# Altium PCB FOS 00_02_00_02 Rev 1_4.PcbDoc
Units mm, origin at the board's own origin, x right, y up, seen from the top; angles counter-clockwise.
Board outline 194.8 x 15.3 mm, 2 copper layers (Top Layer, Bottom Layer), stack 1.571 mm thick; 34 components, 28 nets, 93 pads, 14 vias.
Unrouted connection lines stored in the file: 2.
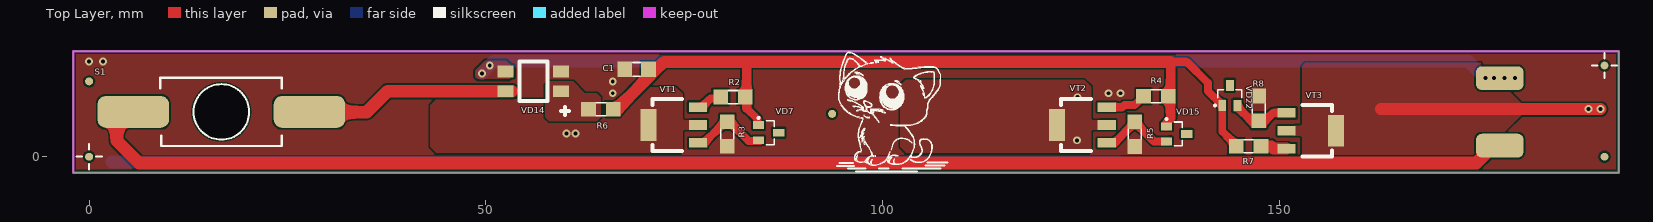
[diagram p0: Top Layer view]
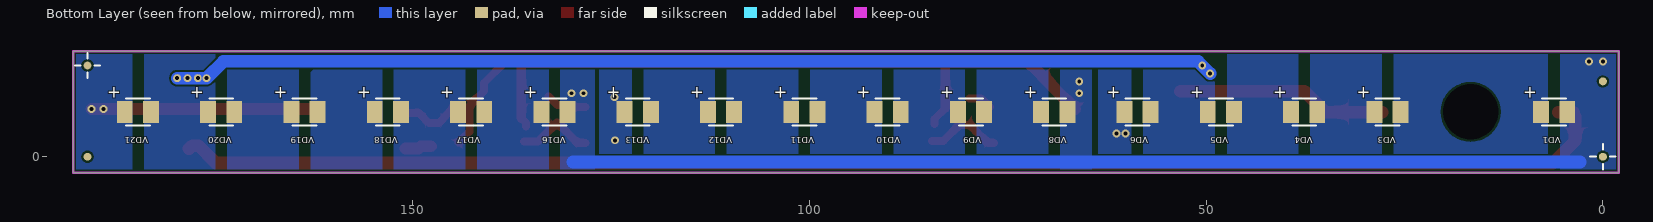
[diagram p1: Bottom Layer view, seen from below]
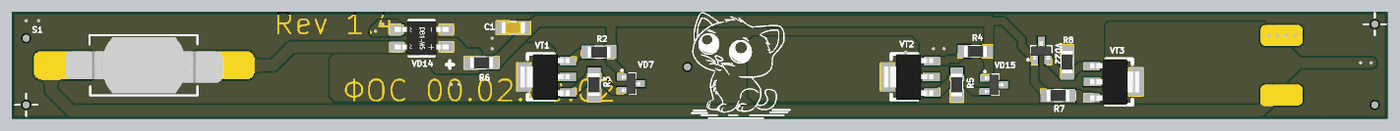
[diagram p2: 3D render of the assembled board from above, using the file's embedded part models]
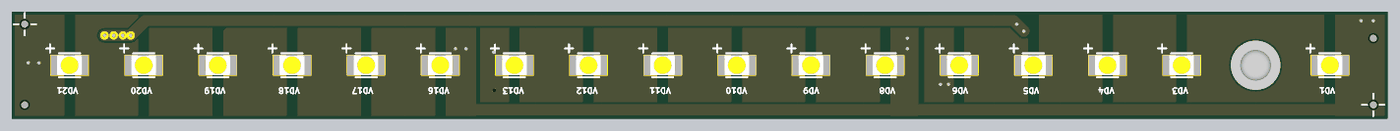
[diagram p3: 3D render of the assembled board from below, using the file's embedded part models]

## Layer stack, top to bottom
Top Solder: solder mask 0.0102, Solder Resist, Dk 3.5
Top Layer: signal copper 0.0356
Dielectric 1: dielectric 1.5, FR-4, Dk 4.8
Bottom Layer: signal copper 0.0356
Bottom Solder: solder mask 0.0102, Solder Resist, Dk 3.5

## Board outline
-2,-2 192.8,-2 192.8,13.3 -2,13.3

## Design rules (kind name [scope] priority, off if disabled: settings)
Clearance [All] p1: gap=0.254 ignorepadtopadclearanceinfootprint=FALSE // 0.5
PolygonConnect [All] p1: connectstyle=Direct reliefconductorwidth=0.254 reliefentries=4 polygonreliefangle="90 Angle" airgapwidth=0.254
RoutingVias [All] p1: holewidth=0.711 width=1.27 viastyle="Through Hole" minholewidth=0.711 minwidth=1.27 maxholewidth=0.711 maxwidth=1.27
SolderMaskExpansion [All] p1: expansion=0.102
Width [All] p1: maxlimit=10 minlimit=0.254 preferedwidth=1.6
30 further rules are at their usual default settings.

## Components (designator, comment, footprint, x,y, rotation, side; value= is the part's Value field where it differs from the comment)
C1 "Capacitor" CAP1206 69,11 r0 top value="1 uF"
R2 "Resistor" RES1206 81.15,7.525 r0 top value="20 Om"
R3 "Resistor" RES1206 80.45,2.875 r90 top value="10 kOm"
R4 "Resistor" RES1206 134.45,7.625 r0 top value="20 Om"
R5 "Resistor" RES1206 131.8,2.85 r90 top value="10 kOm"
R6 "Resistor" RES1206 64.5,6 r180 top value="33 Om"
R7 "Resistor" RES1206 146.15,1.325 r180 top value="20 Om"
R8 "Resistor" RES1206 147.425,6.1 r270 top value="10 kOm"
S1 "button" BUTTON1_2 16.675,5.65 r180 top
VD1 "LED" LED_SAKURA 6.15,5.65 r180 bottom
VD3 "LED" LED_SAKURA 27.15,5.65 r180 bottom
VD4 "LED" LED_SAKURA 37.65,5.65 r180 bottom
VD5 "LED" LED_SAKURA 48.15,5.65 r180 bottom
VD6 "LED" LED_SAKURA 58.65,5.65 r180 bottom
VD7 "BAV23S" "SOT 23" 85.65,3.025 r0 top
VD8 "LED" LED_SAKURA 69.15,5.65 r180 bottom
VD9 "LED" LED_SAKURA 79.65,5.65 r180 bottom
VD10 "LED" LED_SAKURA 90.15,5.65 r180 bottom
VD11 "LED" LED_SAKURA 100.65,5.65 r180 bottom
VD12 "LED" LED_SAKURA 111.15,5.65 r180 bottom
VD13 "LED" LED_SAKURA 121.65,5.65 r180 bottom
VD14 "Diode Bridge" DB-1MS 56,9.5 r270 top value=B1S
VD15 "BAV23S" "SOT 23" 137.075,2.875 r0 top
VD16 "LED" LED_SAKURA 132.15,5.65 r180 bottom
VD17 "LED" LED_SAKURA 142.65,5.65 r180 bottom
VD18 "LED" LED_SAKURA 153.15,5.65 r180 bottom
VD19 "LED" LED_SAKURA 163.65,5.65 r180 bottom
VD20 "LED" LED_SAKURA 174.15,5.65 r180 bottom
VD21 "LED" LED_SAKURA 184.65,5.65 r180 bottom
VD22 "BAV23S" "SOT 23" 143.775,7.725 r90 top
VT1 "PNP" SOT223 73.5,4 r90 top value=BCP53
VT2 "PNP" SOT223 125,4 r90 top value=BCP53
VT3 "PNP" SOT223 154.175,3.275 r270 top value=BCP53
? "Comment" cat 100.625,6.9 r0 top

## Footprints (in the part's own frame and the unit in brackets; to place one, negate y for a bottom-side part, rotate by r counter-clockwise, add the part's x,y. Pads: shape width x height; smd on the part's side, far side on the other; paste and mask are expansions set on the pad)
BUTTON1_2 [mm]
  round 0 hole 7: 0(0,0)
  rrect50% 9x4 smd paste-4: 1(-11.1,0) 2(11.1,0)
  silkscreen extent -7.6,-4.3 7.7,4.3, body extent -11.2,-4 11.2,4, height 4
CAP1206 [mm]
  rect 1.85x1.95 smd: 1(-1.5,0) 2(1.5,0)
  silkscreen extent -0.45,-0.87 0.45,0.87, body extent -1.65,-0.85 1.65,0.85, height 1.5
cat [mm]
  silkscreen extent -6.36,-8.78 7.55,6.25
DB-1MS [mm]
  rect 1.5x2 smd: 1(1.25,3.5) 2(-1.25,3.5) 3(-1.25,-3.5) 4(1.25,-3.5)
  silkscreen extent -2.5,-1.75 4.25,4.5, body extent -2.45,-3.8 2.45,3.8, height 2.9
LED_SAKURA [mm]
  rect 2x2.8 smd: 1(1.651,0) 2(-1.651,0)
  silkscreen extent -1.5,-1.7 1.5,1.7, body extent -1.78,-1.4 1.78,1.4, height 0.7
RES1206 [mm] "Chip Resistor, 2-Leads, Body 3,20x1,60mm, IPC Medium Density"
  rect 1.85x1.85 smd: 1(-1.55,0) 2(1.55,0)
  silkscreen extent -0.6,-0.82 0.6,0.82, body extent -1.6,-0.8 1.6,0.8, height 0.6
SOT223 [mm]
  rect 1.2x2.3 smd: 1(-2.25,-3.25) 2(0,-3.25) 3(2.25,-3.25)
  rect 4x2 smd: 4(0,3)
  silkscreen extent -3.25,-1.25 3.25,2.5, body extent -3.25,-3.48 3.25,3.48, height 1.7
"SOT 23" [mm] "SOT23, 3-Leads, Body 2,90x2,45mm, Pitch 0,95mm, IPC Medium Density"
  rect 1.4x1 smd: 1(-1.275,0.95) 2(-1.275,-0.95) 3(1.275,0)
  silkscreen extent -1.4,-1.5 0.7,2, body extent -1.3,-1.5 1.3,1.5, height 1.1

## Free pads (board coordinates)
  rrect50% 6x3 smd paste-3: 1(177.8,1.4)
  rrect50% 6x3 smd paste-3 mask+0.102: 1(177.8,9.9)
  round 1 smd mask+0.2: 2(0,0) 2(0,9.5) 2(93.65,5.4) 2(191,0) 2(191,11.5)
  round 1 smd far side mask+0.2: 2(0,0) 2(0,9.5) 2(191,0) 2(191,11.5)
  round 1 hole 0.5: 3(176,9.9) 3(177.1,9.9) 3(178.4,9.9) 3(179.7,9.9)

## Via types
v1: diameter 1, hole 0.5, Top Layer to Bottom Layer, tented both sides, 14 vias

## Nets (pads, with @x,y where several pads share a name; then routed paths per layer and width w, separated by ;. In a path a pad name is that pad's centre, name@x,y a point inside that pad or via, vN(x,y) a via of type N, cw(c..) or ccw(c..) an arc to the next point about the centre after c; other vN are vias at no path point)
GND: C1.1 R3.1 R5.1 R8.1 VD1.1 VD8.1 VD14.2 VD16.1 | length 126.9
  Bottom Layer w1.6: 2.9,-0.675 129.8,-0.675
  other v1: 66,8 128.5,8 130,8 66,9.5 0,12 1.75,12
NetC1_2: C1.2 R2.2 R4.2 R6.1 R7.2 VD7.1 VD15.1 VD22.1 | length 103.6
  Top Layer w1: 82.875,6.125 84.225,4.775 VD7.1@84.225,4.15 ; VD15.1@135.725,3.825 135.725,4.275 136.325,4.875 ; 136.325,11.95 138.375,11.95 141,9.325 141,8.3 142.825,6.475 VD22.1 142.825,3.2 R7.2@144.225,1.8
  Top Layer w1.2: 82.875,6.125 82.875,11.9 ; 136.325,4.875 136.325,11.95
  Top Layer w1.5: R6.1@66.5,6 72.45,11.95 136.325,11.95
NetR2_1: R2.1 VT1.3 | length 3
  Top Layer w1: VT1.3@77.275,6.275 78.35,7.35 R2.1@79.825,7.35
NetR3_2: R3.2 VD7.2 VT1.1 | length 9.6
  Top Layer w1: VT1.1 77.525,1.75 79.775,4 81.125,4 83.125,2 VD7.2@84.55,2
NetR4_1: R4.1 VT2.3 | length 5.2
  Top Layer w1: VT2.3 130.25,6.25 130.5,6.5 131.775,6.5 R4.1
NetR5_2: R5.2 VD15.2 VT2.1 | length 9.8
  Top Layer w1: VT2.1 129.25,1.75 131.825,4.325 134.225,1.925 VD15.2 VD15.2@136,1.925
NetR6_2: R6.2 VD14.1
NetR7_1: R7.1 VT3.3 | length 3.3
  Top Layer w1.5: R7.1 149,1.325 149.3,1.025 VT3.3
NetR8_2: R8.2 VD22.2 VT3.1 | length 7.4
  Top Layer w1: VD22.2@144.825,6.175 146.775,4.225 147.925,4.225 149.225,5.525 VT3.1
NetVD1_2: VD1.2 VD3.1
NetVD3_2: VD3.2 VD4.1
NetVD4_2: VD4.2 VD5.1
NetVD5_2: VD5.2 VD6.1
NetVD6_2: VD6.2 VT1.2 VT1.4
  other v1: 61.3,2.925 60.175,2.95
NetVD8_2: VD8.2 VD9.1
NetVD9_2: VD9.2 VD10.1
NetVD10_2: VD10.2 VD11.1
NetVD11_2: VD11.2 VD12.1
NetVD12_2: VD12.2 VD13.1
NetVD13_2: VD13.2 VT2.2 VT2.4
  other v1: 124.5,2.075 124.575,7.5
NetVD16_2: VD16.2 VD17.1
NetVD17_2: VD17.2 VD18.1
NetVD18_2: VD18.2 VD19.1
NetVD19_2: VD19.2 VD20.1
NetVD20_2: VD20.2 VD21.1
NetVD21_2: VD21.2 VT3.2 VT3.4 | length 27.7
  Top Layer w1.5: 162.8,6 v1(189,6) v1(190.5,6)
POWER1: pad.1@177.8,9.9 pad.3 VD14.3 | length 131.7
  Bottom Layer w1.6: v1(49.5,10.5) 51.025,12.025 173.875,12.025 176,9.9 177.1,9.9 178.4,9.9 pad.3@179.7,9.9
  other v1: 50.5,11.5
POWER2: pad.1@177.8,1.4 S1.1 S1.2 VD14.4 | length 208.4
  Top Layer w1.6: S1.2@3.5,5 3.5,2 6.296,-0.796 174.828,-0.796 177.024,1.4 177.8,1.4 pad.1@178.2,1 ; S1.2@3.7,5.625 S1.2@5.6,5.625 ; S1.1@27.8,5.625 35,5.625 37.625,8.25 VD14.4 VD14.4@53.275,8.25
pads on no net: S1.0 VD7.3 VD15.3 VD22.3

## Polygon pours and split planes (outlines as drawn)
NetVD20_2 on Bottom Layer "Bottom Layer-No Net 1" (solid, remove dead copper, pour order 38): 174.925,13.3 183.875,13.3 183.875,-2 174.925,-2
NetVD19_2 on Bottom Layer "Bottom Layer-No Net 1" (solid, remove dead copper, pour order 36): 164.375,13.3 173.4,13.3 173.4,-2 164.375,-2
NetVD18_2 on Bottom Layer "Bottom Layer-No Net 1" (solid, remove dead copper, pour order 34): 153.875,13.3 162.875,13.3 162.875,-2 153.875,-2
NetVD17_2 on Bottom Layer "Bottom Layer-No Net 1" (solid, remove dead copper, pour order 32): 143.4,13.3 152.375,13.3 152.375,-2 143.4,-2
NetVD16_2 on Bottom Layer "Bottom Layer-No Net 1" (solid, remove dead copper, pour order 30): 132.875,13.3 141.9,13.3 141.9,-2 132.875,-2
GND on Bottom Layer "Bottom Layer-No Net 1" (solid, remove dead copper, pour order 28): 127.075,13.3 131.4,13.3 131.4,-2 127.075,-2
NetVD13_2 on Bottom Layer "Bottom Layer-No Net 1" (solid, remove dead copper, pour order 26): 122.4,13.3 126.5,13.3 126.5,-2 122.4,-2
NetVD12_2 on Bottom Layer "Bottom Layer-No Net 1" (solid, remove dead copper, pour order 24): 111.925,13.3 120.9,13.3 120.9,-2 111.925,-2
NetVD11_2 on Bottom Layer "Bottom Layer-No Net 1" (solid, remove dead copper, pour order 22): 101.4,13.3 110.4,13.3 110.4,-2 101.4,-2
NetVD10_2 on Bottom Layer "Bottom Layer-No Net 1" (solid, remove dead copper, pour order 20): 90.9,13.3 99.9,13.3 99.9,-2 90.9,-2
NetVD9_2 on Bottom Layer "Bottom Layer-No Net 1" (solid, remove dead copper, pour order 18): 80.425,13.3 89.375,13.3 89.375,-2 80.425,-2
NetVD8_2 on Bottom Layer "Bottom Layer-No Net 1" (solid, remove dead copper, pour order 16): 69.9,13.3 78.9,13.3 78.9,-2 69.9,-2
GND on Bottom Layer "Bottom Layer-No Net 1" (solid, remove dead copper, pour order 14): 68.4,13.3 64.4,13.3 64.4,-2 68.4,-2
NetVD6_2 on Bottom Layer "Bottom Layer-No Net 1" (solid, remove dead copper, pour order 12): 59.425,13.3 63.6,13.3 63.6,-2 59.425,-2
NetVD5_2 on Bottom Layer "Bottom Layer-No Net 1" (solid, remove dead copper, pour order 10): 48.925,13.301 57.925,13.301 57.925,-1.999 48.925,-1.999
GND on Bottom Layer "Bottom Layer-No Net 1" (solid, remove dead copper, pour order 0): 5.4,13.3 -2,13.3 -2,-2 5.4,-2
NetVD3_2 on Bottom Layer "Bottom Layer-No Net 1" (solid, remove dead copper, pour order 6): 27.9,13.3 36.875,13.3 36.875,-2 27.9,-2
NetVD4_2 on Bottom Layer "Bottom Layer-No Net 1" (solid, remove dead copper, pour order 8): 38.4,13.301 47.375,13.301 47.375,-1.999 38.4,-1.999
NetVD21_2 on Bottom Layer "Bottom Layer-No Net 1" (solid, remove dead copper, pour order 40): 185.375,13.3 192.8,13.3 192.8,-2 185.375,-2
NetVD1_2 on Bottom Layer "Bottom Layer-No Net 1" (solid, remove dead copper, pour order 2): 6.925,13.3 26.375,13.3 26.375,-2 6.925,-2
GND on Top Layer "Bottom Layer-No Net 1" (solid, remove dead copper, pour order 68): -2,-2 -2,13.3 192.8,13.3 192.8,-2
NetVD21_2 on Top Layer "Bottom Layer-No Net 1" (solid, remove dead copper, pour order 62): 180.5,5.25 175.112,-0.147 153.297,-0.147 152.875,0.275 152.875,2.475 152.675,2.675 151.875,2.675 151.875,3.875 152.675,3.875 152.875,4.075 152.875,11.425 153.3,11.85 175.4,11.85 180.5,6.75
NetVD6_2 on Top Layer "Bottom Layer-No Net 1" (solid, remove dead copper, pour order 66): 66.1,0.5 43.75,0.5 43,1.25 43,6.5 43.75,7.25 66.1,7.25
NetVD6_2 on Top Layer "Bottom Layer-No Net 1" (solid, remove dead copper, pour order 58): 65.425,4.158 70.034,8.775 73.95,8.775 74.8,7.925 74.8,4.8 75,4.6 75.8,4.6 75.8,3.4 75,3.4 74.8,3.2 74.8,0.9 74.4,0.5 66.1,0.5 65.425,1.175
NetR6_2 on Top Layer "Bottom Layer-No Net 1" (solid, remove dead copper, pour order 42): 58,9.5 61,9.5 62.5,8 64,8 64.5,7.5 64.5,5 64,4.5 58,4.5 57.5,5 57.5,9
POWER1 on Top Layer "Bottom Layer-No Net 1" (solid, remove dead copper, pour order 54): 53.5,11.2 52.6,12.1 49.9,12.1 48.7,10.9 48.7,10 48.9,9.8 53,9.8 53.5,10.3
NetVD13_2 on Top Layer "Bottom Layer-No Net 1" (solid, remove dead copper, pour order 60): 102.25,9.001 102.948,9.7 125.4,9.7 126.3,8.8 126.3,4.8 126.5,4.6 127.3,4.6 127.3,3.4 126.5,3.4 126.3,3.2 126.3,0.9 125.9,0.5 103,0.5 102.25,1.25

## Keep-outs
Keep-Out Layer:
  the board outline again, w0.3

## Silkscreen, mask and mechanical layers (free items; w line width, h text height)
Top Overlay:
  rectangle: 101.595,6.365 102.233,6.496
  rectangle: 101.423,6.445 102.375,7.275
  rectangle: 100.375,6.545 101.091,7.2
  rectangle: 96.767,7.782 97.872,8.644
  rectangle: 96,7.784 97.042,8.475
  lines w0.254: -1.6,0 -0.9,0 ; 0,-1.6 0,-0.9 ; 0,0.9 0,1.6 ; 0.9,0 1.6,0 ; 189.4,11.5 190.1,11.5 ; 191,9.9 191,10.6 ; 191,12.4 191,13.1 ; 191.9,11.5 192.6,11.5
Bottom Overlay:
  lines w0.254: -1.6,0 -0.9,0 ; 0,-1.6 0,-0.9 ; 0,0.9 0,1.6 ; 0.9,0 1.6,0 ; 189.4,11.5 190.1,11.5 ; 191,9.9 191,10.6 ; 191,12.4 191,13.1 ; 191.9,11.5 192.6,11.5
Top Solder:
  text "Rev 1.4" at 34.825,10.175 h3
  text "ФОС 00.02.00.02" at 44.7,0.6 h3
Mechanical 3:
  circle w0.254: c177.225,0.975 r1.125
  circle w0.254: c177.2,10.5 r1.125
  circle w0.254: c16.675,5.65 r3.5
Mechanical 4:
  lines w0.05: -2.225,5.65 1.375,5.65 192.975,5.65 ; 6.15,3.925 6.15,7.375 ; 16.65,3.925 16.65,7.375 ; 27.15,3.925 27.15,7.375 ; 37.65,3.925 37.65,7.375 ; 48.15,3.925 48.15,7.375 ; 58.65,3.925 58.65,7.375 ; 69.15,3.925 69.15,7.375 ; 79.65,3.925 79.65,7.375 ; 90.15,3.925 90.15,7.375 ; 100.65,3.925 100.65,7.375 ; 111.15,3.925 111.15,7.375 ; 121.65,3.925 121.65,7.375 ; 132.15,3.925 132.15,7.375 ; 142.65,3.925 142.65,7.375 ; 153.15,3.925 153.15,7.375 ; 163.65,3.925 163.65,7.375 ; 174.15,3.925 174.15,7.375 ; 184.65,3.925 184.65,7.375

## Text inside footprints (layer, text, board x,y; h text height)
VD1: Bottom Overlay "+" at 10.025,7.45 h1.52
VD3: Bottom Overlay "+" at 31.025,7.45 h1.52
VD4: Bottom Overlay "+" at 41.525,7.45 h1.52
VD5: Bottom Overlay "+" at 52.025,7.45 h1.52
VD6: Bottom Overlay "+" at 62.525,7.45 h1.52
VD8: Bottom Overlay "+" at 73.025,7.45 h1.52
VD9: Bottom Overlay "+" at 83.525,7.45 h1.52
VD10: Bottom Overlay "+" at 94.025,7.45 h1.52
VD11: Bottom Overlay "+" at 104.525,7.45 h1.52
VD12: Bottom Overlay "+" at 115.025,7.45 h1.52
VD13: Bottom Overlay "+" at 125.525,7.45 h1.52
VD16: Bottom Overlay "+" at 136.025,7.45 h1.52
VD17: Bottom Overlay "+" at 146.525,7.45 h1.52
VD18: Bottom Overlay "+" at 157.025,7.45 h1.52
VD19: Bottom Overlay "+" at 167.525,7.45 h1.52
VD20: Bottom Overlay "+" at 178.025,7.45 h1.52
VD21: Bottom Overlay "+" at 188.525,7.45 h1.52